# EAGLE board preScale-Mb501 (EAGLE 5.07)
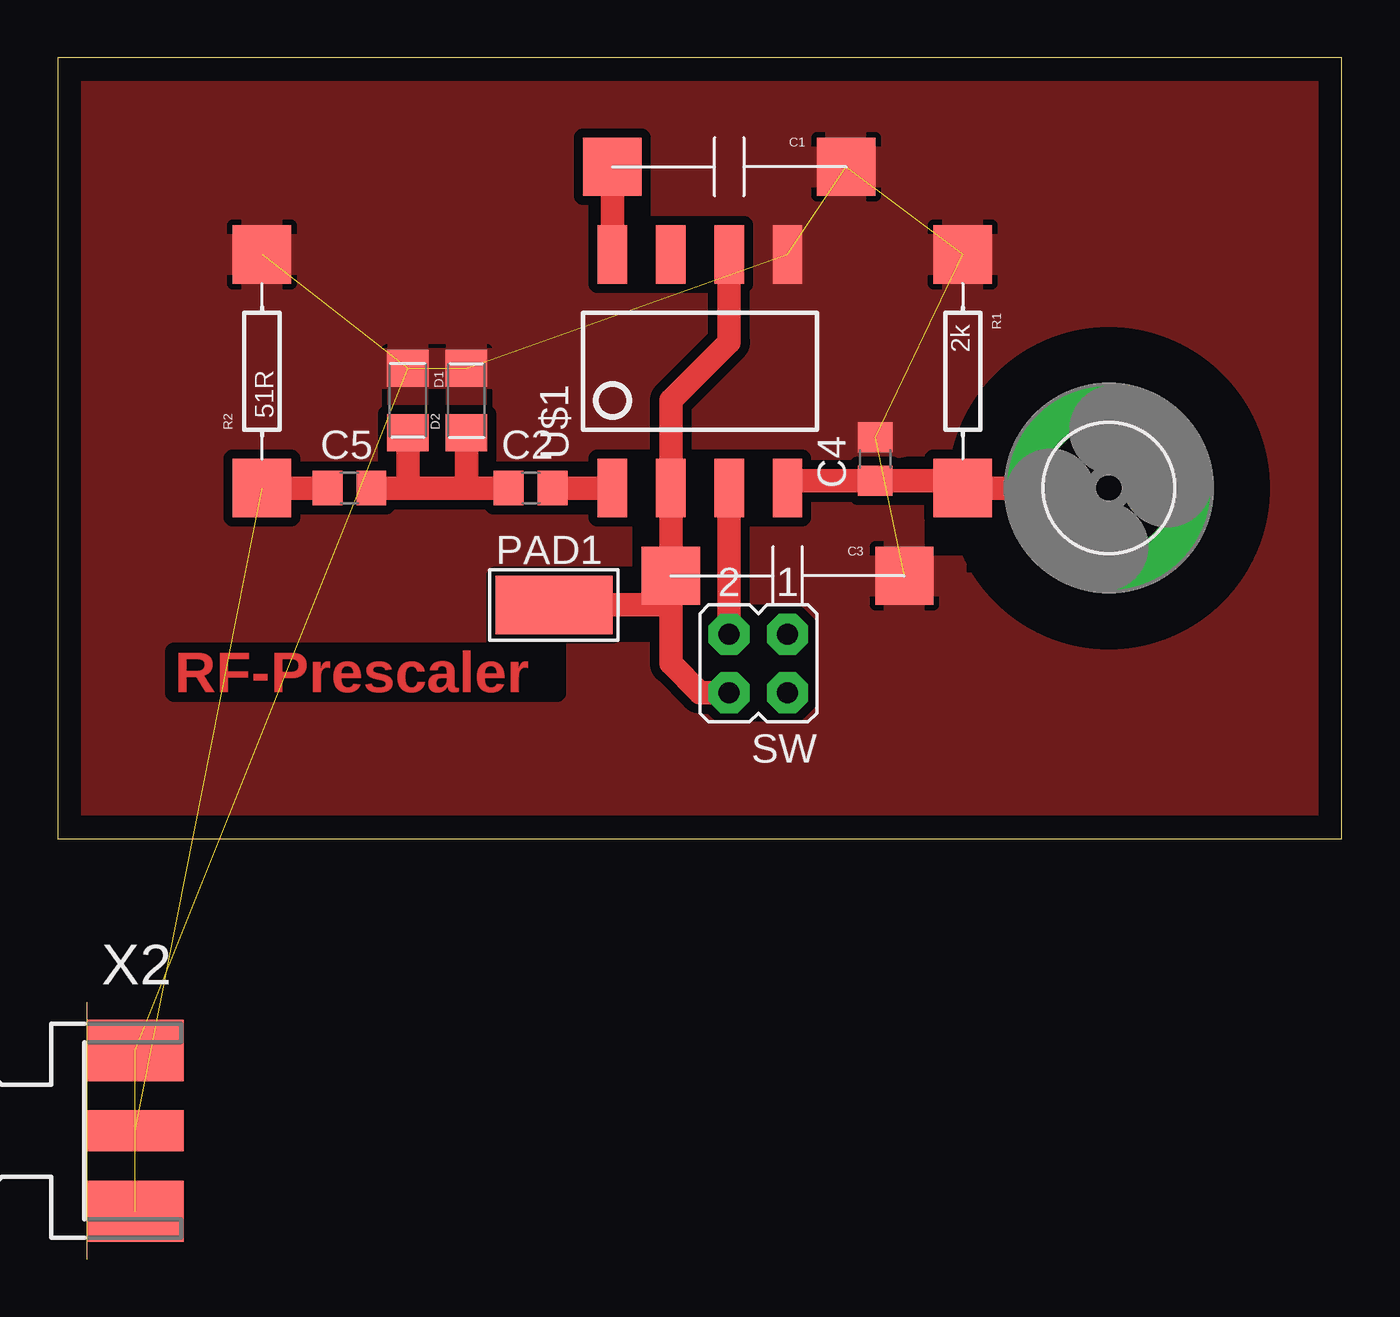
[diagram p0: board, top side]
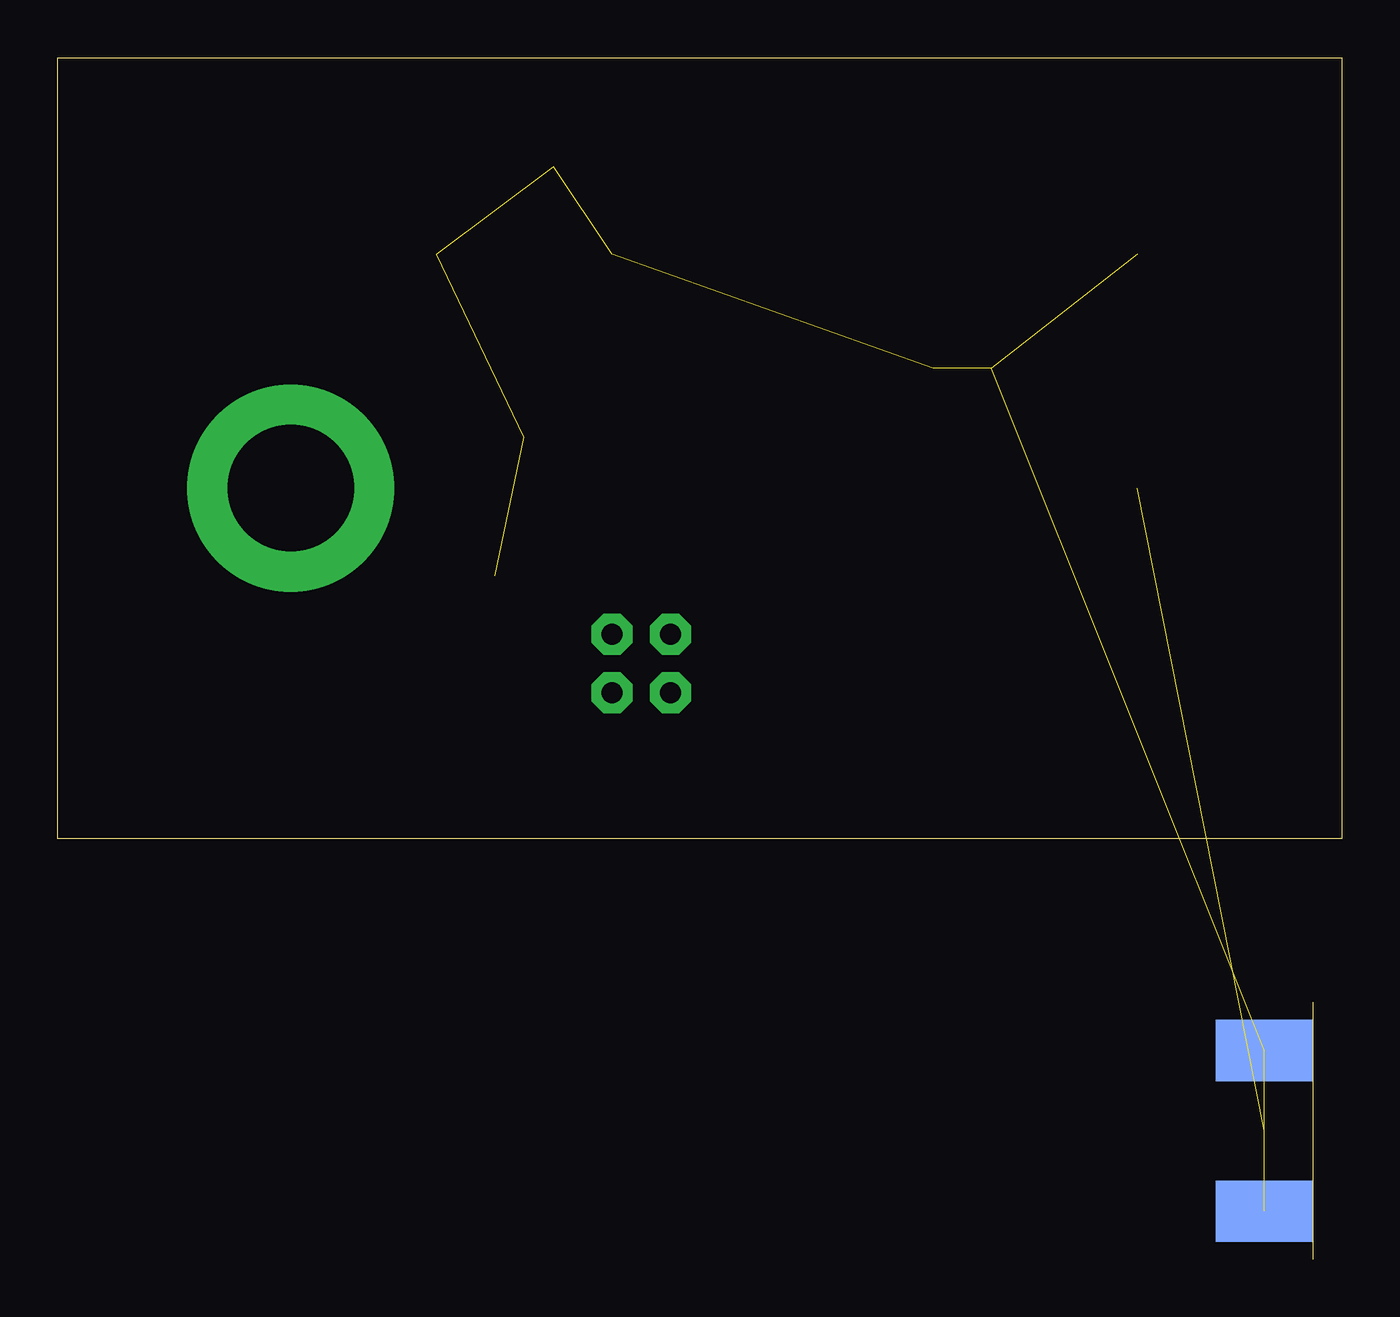
[diagram p1: board, bottom side, seen from below]

Size 55.86 x 33.96 mm. Coordinates in mm from the lower left corner, seen from the top.
Outline: 0,0 55.86,0 55.86,33.96 0,33.96 0,0
Copper layers (1*16): Top 0.035mm / dielectric 1.5mm / Bottom 0.035mm
Design rules "default": minimum track width 10mil, minimum drill 24mil, track to track 8mil, track to pad 8mil, pad to pad 8mil, via to via 8mil, smd to smd 8mil, copper to edge 40mil, drill to drill 8mil, minimum pad ring 10mil, minimum via ring 8mil, stop-mask expansion 4mil, vias tented up to drill 0mil, thermal gap 10mil

## Footprints (pad centres in the part's own frame; a part is rotated, then mirrored left to right if it is on the bottom)
CAP-SMD-SMALL = smd 2.54 x 2.54: P$1 5.08,0; P$2 -5.08,0
C0805 = smd 1.3 x 1.5: 1 -0.95,0; 2 0.95,0
1206-DIODE = smd 1.6 x 1.8: A -1.4,0; K 1.4,0
5,5-PAD = drill 5.5 pad 9 round: B5,5 0,0
5-2,5 = smd 2.54 x 5.08: 1 0,0
AXIAL-0.3-SMD = smd 2.54 x 2.54: P$1 -5.08,0; P$2 5.08,0
JP2Q = drill 0.914 pad 1.778 octagon: 1 -1.27,-1.27; 2 -1.27,1.27; 3 1.27,-1.27; 4 1.27,1.27
DIP8-RF = smd 1.27 x 2.54: P$1 0,-3.81; P$2 2.54,-3.81; P$3 5.08,-3.81; P$4 7.62,-3.81; P$5 7.62,6.35; P$6 5.08,6.35; P$7 2.54,6.35; P$8 0,6.35
J502-ND-142-0711-821/826 = smd 4.191 x 1.778: 1 2.115,0 | smd 4.191 x 2.667: G@1 2.115,3.495; G@2 2.115,-3.495 | smd 4.191 x 2.667 bottom: G@3 2.115,3.495; G@4 2.115,-3.495

## Placement (x,y rotation side)
C1  102  [CAP-SMD-SMALL]  29.21,29.21 180 top
C2  102  [C0805]  20.57,15.24 0 top
C3  104  [CAP-SMD-SMALL]  31.75,11.43 180 top
C4  12pF  [C0805]  35.56,16.51 90 top
C5  102  [C0805]  12.7,15.24 0 top
D1  [1206-DIODE]  15.24,19.05 270 top
D2  [1206-DIODE]  17.78,19.05 90 top
H2  BanPlug  [5,5-PAD]  45.72,15.24 0 top
PAD1  WIREPADSMD5-2,5  [5-2,5]  21.59,10.16 270 top
R1  2k  [AXIAL-0.3-SMD]  39.37,20.32 270 top
R2  51R  [AXIAL-0.3-SMD]  8.89,20.32 90 top
SW  [JP2Q]  30.48,7.62 180 top
U$1  MB504-RF  [DIP8-RF]  24.13,19.05 0 top
X2  SMA-142-0711-821/826  [J502-ND-142-0711-821/826]  1.27,-12.7 0 top  (outside the outline)

## Library data of the parts
C1-C5 D1 D2 R1 R2 SW = digital-toy
H2 = holes
PAD1 = wirepad
U$1 = dtoy-RF
X2 = con-coax

## Nets
GND: C1.P$2 C3.P$2 C4.2 D1.A D2.K R1.P$1 R2.P$2 U$1.P$5 X2.G@1 X2.G@2 X2.G@3 X2.G@4
N$1: C1.P$1 U$1.P$8
N$2: C2.2 U$1.P$1
N$3: C2.1 C5.2 D1.K D2.A
N$4: C4.1 H2.B5,5 R1.P$2 U$1.P$4
N$5: C5.1 R2.P$1 X2.1
N$7: SW.3 U$1.P$3
VCC: C3.P$1 PAD1.1 SW.4 U$1.P$2 U$1.P$6

## Tracks (layer width: path | path; a pad name or v marks a point on that pad's centre or on a via)
GND  (11 unrouted)
  pour Top (isolate 0.406): -1.27,49.53 54.61,49.53 71.12,29.21 68.58,11.43 44.45,-12.7 2.54,-3.81 -11.43,3.81 -7.62,43.18
N$1
  Top 1.016: U$1.P$8 C1.P$1
N$2
  Top 1.016: C2.2 U$1.P$1
N$3
  Top 1.016: C5.2 15.24,15.24 | 15.24,15.24 17.78,15.24 | 17.78,15.24 C2.1 | 15.24,15.24 D1.K | 17.78,15.24 D2.A
N$4
  Top 1.016: H2.B5,5 R1.P$2 39.05,15.56 C4.1 32.07,15.56 U$1.P$4
N$5  (1 unrouted)
  Top 1.016: R2.P$1 C5.1
N$7
  Top 1.016: SW.3 U$1.P$3
VCC
  Top 1.016: U$1.P$6 29.21,21.59 26.67,19.05 U$1.P$2 C3.P$1 26.67,10.16 | SW.4 27.94,6.35 26.67,7.62 26.67,10.16 | PAD1.1 26.67,10.16

## Text on the board
Top: RF-Prescaler